# EAGLE board LipSync_Interface_Board (EAGLE 7.6.0)
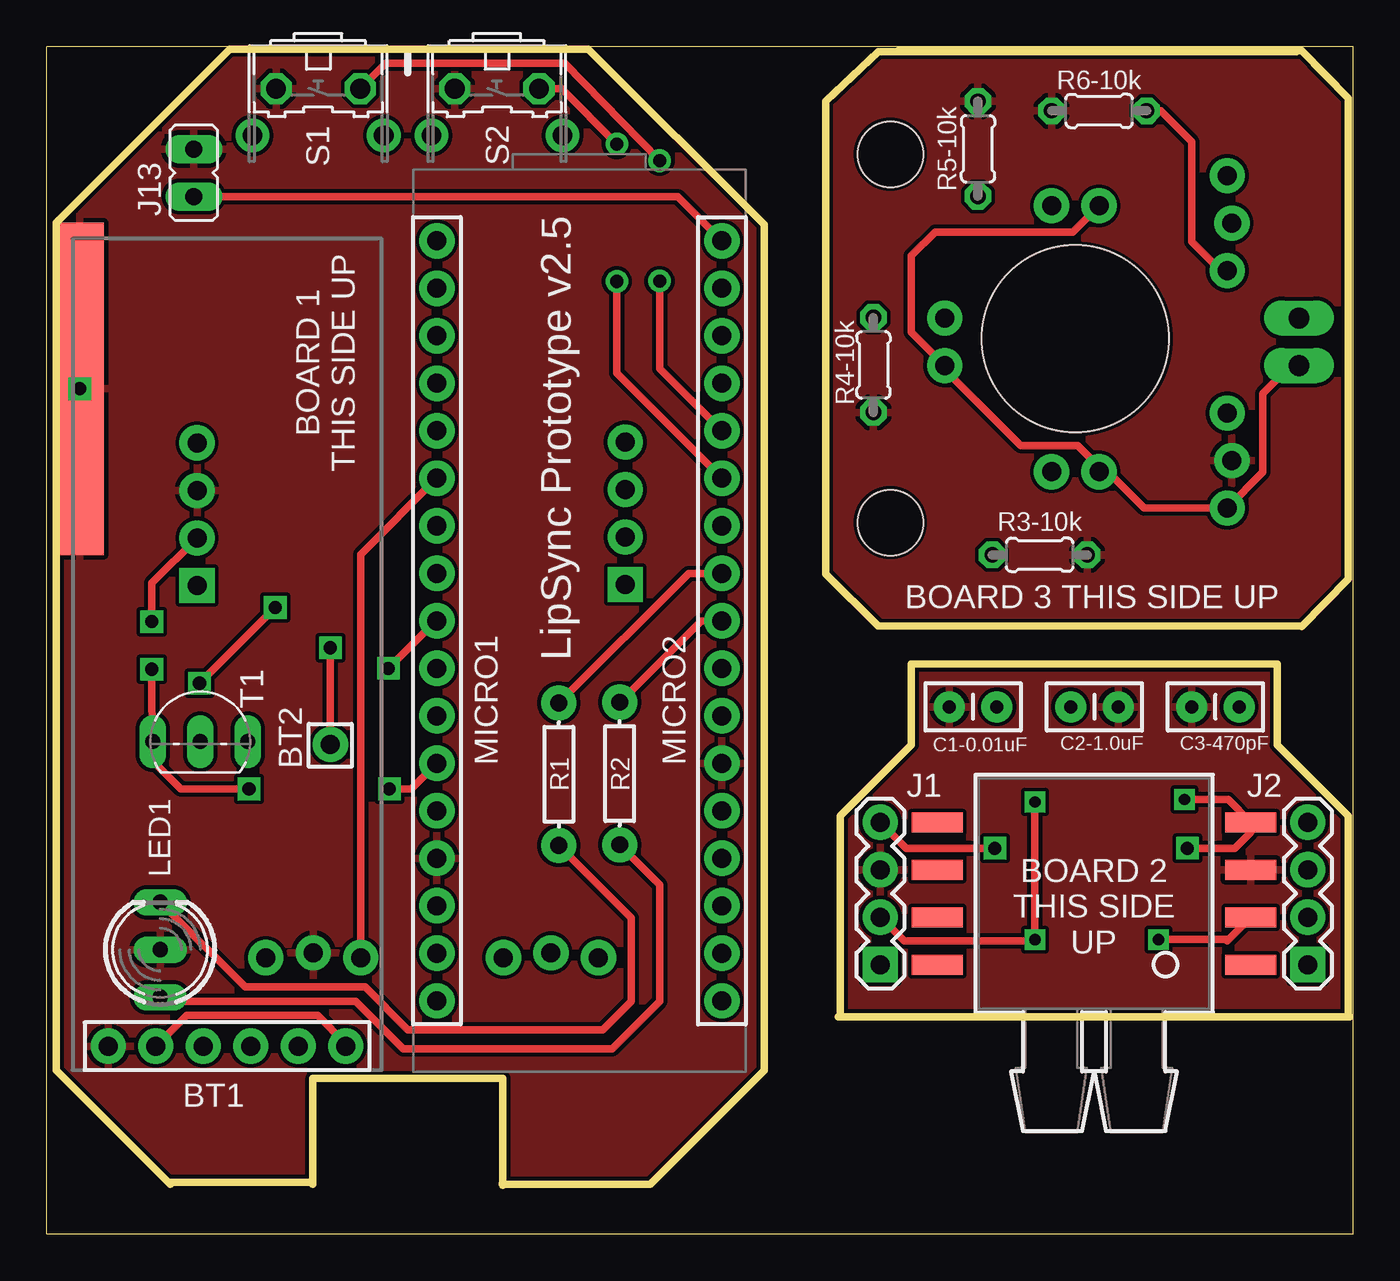
[diagram p0: board, top side]
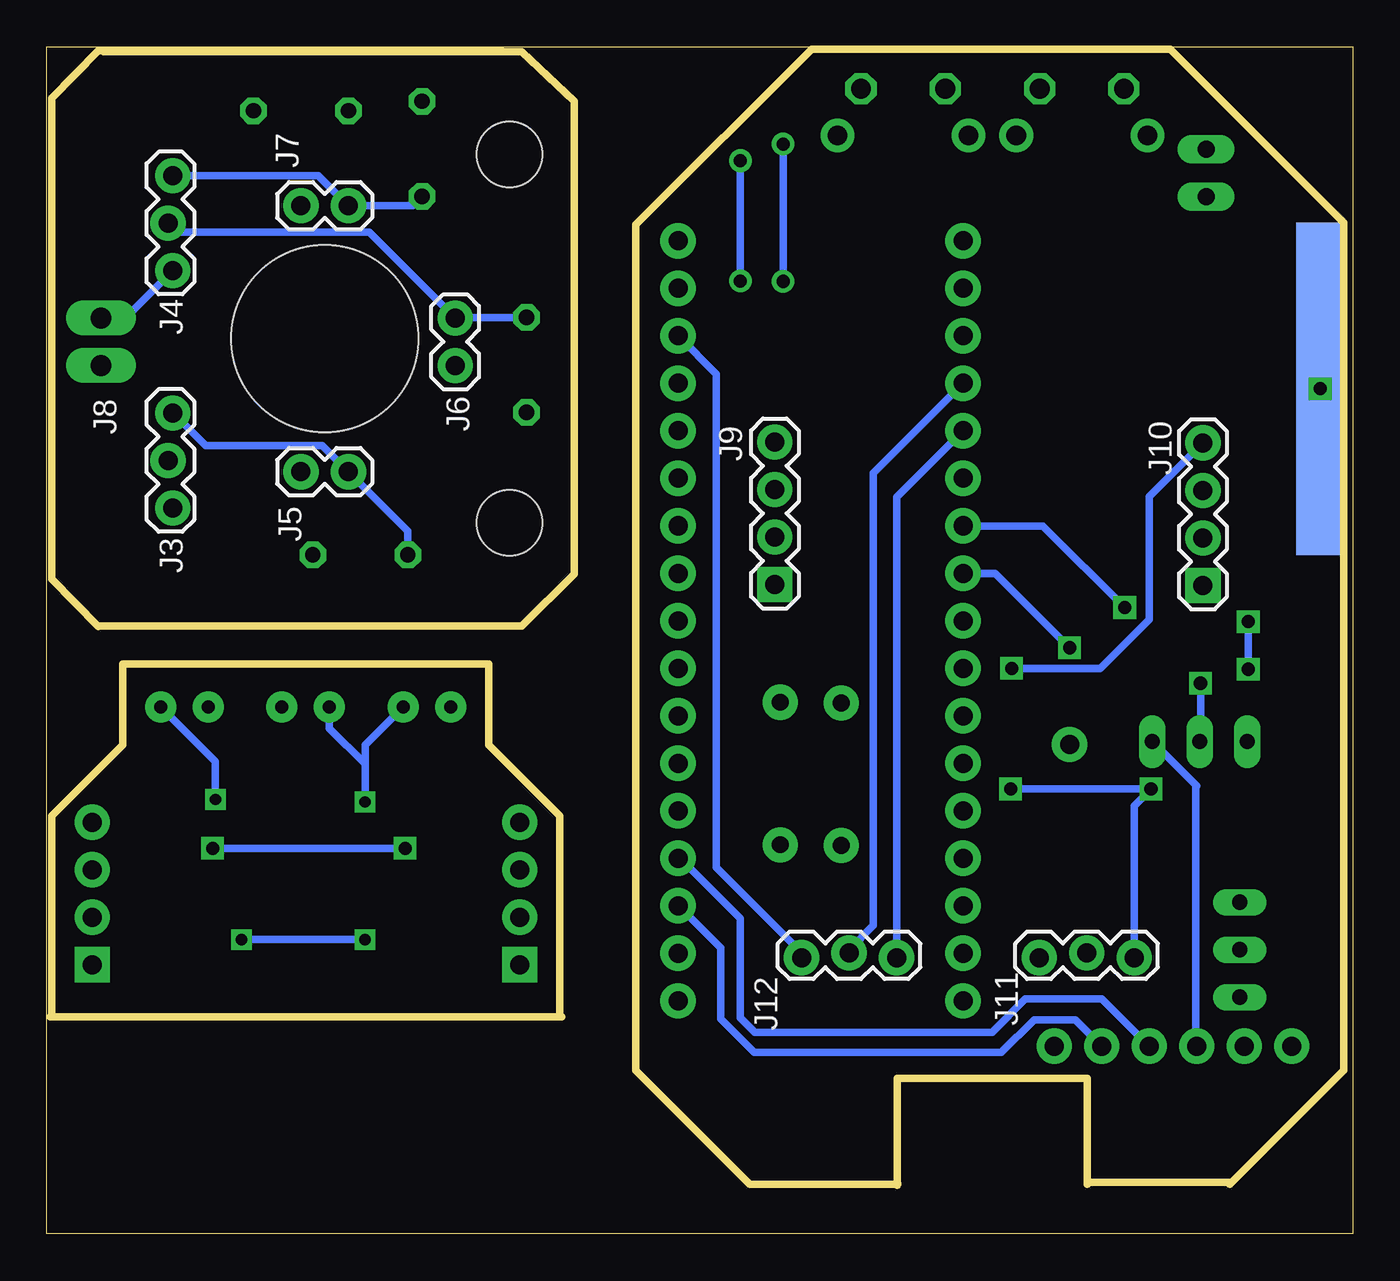
[diagram p1: board, bottom side, seen from below]

Size 69.85 x 63.5 mm. Coordinates in mm from the lower left corner, seen from the top.
Outline: 6.6,2.67 0.51,8.76 0.51,54.1 9.78,63.37 28.96,63.37 38.35,53.98 38.35,8.76 32.26,2.67
Outline: 69.67,11.61 42.32,11.61
Outline: 45.54,63.28 67.09,63.28 69.59,60.74 69.59,35.02 67.09,32.48
Outline: 14.22,2.65 14.22,8.33 24.38,8.33 24.38,2.6
Outline: 14.21,2.75 6.62,2.75 6.62,2.65
Outline: 32.27,2.65 24.36,2.65 24.36,2.71
Outline: 46.3,30.48 65.79,30.48 65.79,26.16 69.6,22.35 69.6,11.68
Outline: 66.8,63.25 44.45,63.25 41.66,60.58 41.66,35.31 44.45,32.51 67.09,32.51
Outline: 46.23,30.48 46.23,26.16 42.42,22.35 42.42,11.68
Outline: 0,0 69.85,0 69.85,63.5 0,63.5 0,0
Copper layers (1*16): Top 0.035mm / dielectric 1.5mm / Bottom 0.035mm
Design rules "SparkFun": minimum track width 8mil, minimum drill 20mil, track to track 8mil, track to pad 8mil, pad to pad 8mil, via to via 8mil, smd to smd 8mil, copper to edge 8mil, drill to drill 8mil, minimum pad ring 12mil, minimum via ring 10mil, stop-mask expansion 4mil, vias tented up to drill 20mil, thermal gap 10mil
Net classes: 0 GND: clearance 0.205 mm; 2 GND2: clearance 0.205 mm to class 0, clearance 0.205 mm to class 1, clearance 0.205 mm; 3 GND3: clearance 0.205 mm to class 0, clearance 0.205 mm to class 1, clearance 0.205 mm to class 2, clearance 0.205 mm
Holes 10 mm at 54.99,47.88
Holes 3.5 mm at 45.11,38.04 45.11,57.74

## Footprints (pad centres in the part's own frame; a part is rotated, then mirrored left to right if it is on the bottom)
CAP-PTH-SMALLEZ = drill 0.7 pad 1.651: 1 0,0; 2 2.54,0
1X02 = drill 1.016 pad 1.88: 1 0,0; 2 2.54,0
1X04 = drill 1.016 pad 1.88 square: 1 0,0 | drill 1.016 pad 1.88: 2 2.54,0; 3 5.08,0; 4 7.62,0
1X03_LOCK = drill 1.016 pad 1.88: 1 0,0.127; 2 2.54,-0.127; 3 5.08,0.127
1X02_LONGPADS = drill 1.118 pad 1.88 long: 1 0,0; 2 2.54,0
JP1 = drill 0.914 long: 1 0,-1.27; 2 0,1.27
DUOLED-C-5MM = drill 0.813 long: AR 2.54,0; AX -2.54,0; C 0,0
AXIAL-0.3 = drill 0.9 pad 1.88: P$1 -3.81,0; P$2 3.81,0
0204/5 = drill 0.813 octagon: 1 -2.54,0; 2 2.54,0
B3F-31XX-CUSTOM = drill 1.05 pad 1.6 octagon: 1 -2.25,-1.245; 2 2.25,-1.245 | drill 1.05 pad 1.8: 3 -3.505,1.245; 4 3.505,1.245
TO92-EBC = drill 0.813 long: B 0,-1.27; C 2.54,-1.27; E -2.54,-1.27
BLUE_MATE_RN42_HEADER_FOOTPRINT = drill 1.016 pad 1.88: CTS-I 1.27,12.065; GND 1.27,14.605; PIO4 17.399,2.731; RTS-O 1.27,1.905; RX-I 1.27,4.445; TX-O 1.27,6.985; VCC 1.27,9.525
SOP8 = smd 2.731 x 1.067: 1 8.382,-3.81; 2 8.382,-1.27; 3 8.382,1.27; 4 8.382,3.81; 5 -8.382,3.81; 6 -8.382,1.27; 7 -8.382,-1.27; 8 -8.382,-3.81
ARDUINO_MICRO_HEADER_FOOTPRINT = drill 1.016 pad 1.88: 3V3 16.51,6.35; 5V 16.51,31.75; A0 16.51,11.43; A1 16.51,13.97; A2 16.51,16.51; A3 16.51,19.05; A4 16.51,21.59; A5 16.51,24.13; D2 1.27,29.21; D3 1.27,26.67; D4 1.27,24.13; D5 1.27,21.59; D6 1.27,19.05; D7 1.27,16.51; D8 1.27,13.97; D9 1.27,11.43; D10 1.27,8.89; D11 1.27,6.35; D12 1.27,3.81; D13 16.51,3.81; GND 1.27,31.75; GND@1 16.51,36.83; MISO 16.51,41.91; MOSI 1.27,44.45; NC 16.51,26.67; NC@1 16.51,29.21; REF 16.51,8.89; RST 1.27,34.29; RST@1 16.51,34.29; RX1 1.27,36.83; SCK 16.51,44.45; SS 1.27,41.91; TX1 1.27,39.37; VIN 16.51,39.37
EXPOSED_GND = smd 2.54 x 17.78: GND1 0,0

## Placement (x,y rotation side)
C1  470pF  [CAP-PTH-SMALLEZ]  63.75,28.19 180 top
C2  0.01uF  [CAP-PTH-SMALLEZ]  54.74,28.19 0 top
C3  1.0uF  [CAP-PTH-SMALLEZ]  50.8,28.19 180 top
J1  [1X02]  56.26,40.77 0 bottom
J2  [1X02]  56.26,54.99 0 bottom
J3  [1X04]  8.03,34.69 90 bottom
J4  [1X04]  67.43,14.4 90 top
J5  [1X04]  44.57,14.4 90 top
J6  [1X04]  30.92,34.73 90 bottom
J7  [1X03_LOCK]  24.42,14.9 180 bottom
J8  [1X03_LOCK]  11.72,14.9 180 bottom
J9  [1X03_LOCK]  63.24,43.91 270 bottom
J10  [1X02_LONGPADS]  66.95,46.45 90 bottom
J11  [1X03_LOCK]  63.24,56.61 270 bottom
J12  [1X02]  48.02,46.45 90 bottom
JP1  [JP1]  7.87,56.76 180 top
LED1  [DUOLED-C-5MM]  6.07,15.21 90 top
R1  300  [AXIAL-0.3]  30.63,24.63 270 top
R2  300  [AXIAL-0.3]  27.38,24.59 270 top
R3  [0204/5]  53.09,36.32 180 top
R4  [0204/5]  49.78,58.04 270 top
R5  [0204/5]  56.26,60.07 0 top
R6  [0204/5]  44.2,46.48 90 top
S1  [B3F-31XX-CUSTOM]  14.51,60.01 180 top
S2  [B3F-31XX-CUSTOM]  24.07,60.01 180 top
T1  2N3906  [TO92-EBC]  8.21,27.61 0 top
U2  SF_MATE_RN42  [BLUE_MATE_RN42_HEADER_FOOTPRINT]  17.9,8.78 90 top
U3  MPXV7002  [SOP8]  56,18.21 0 top
U$1  ARDUINO_MICRO  [ARDUINO_MICRO_HEADER_FOOTPRINT]  37.37,56.93 180 top
U$2  EXPOSED_GND  [EXPOSED_GND]  1.76,45.2 0 top
U$3  EXPOSED_GND  [EXPOSED_GND]  1.76,45.2 0 bottom

## Library data of the parts
C1-C3 = SparkFun-Capacitors
J1 J2 J7-J12 = SparkFun-Connectors
J3-J6 = SparkFun-Connectors; PROD_ID: CONN-09696
JP1 = jumper
LED1 = led
R1 R2 = SparkFun-Passives
R3-R6 = resistor
S1 S2 = switch-omron
T1 = transistor-neu-to92
U2 U3 U$1-U$3 = IVAN_custom

## Nets
3V3: U$1.3V3
GND: J3.3 J8.2 JP1.1 LED1.C S1.2 S2.2 U2.GND U$1.GND U$1.GND@1 U$2.GND1 U$3.GND1
GND2 [GND2]: C1.2 C2.2 C3.2 J5.3 U3.3
GND3: J9.2 R3.1 R4.1 R5.1 R6.1
N$1: U2.PIO4 U$1.A4
N$2: T1.C U2.VCC
N$3: U2.TX-O U$1.RX1
N$4: U2.RX-I U$1.TX1
N$5: J7.2 U$1.A0
N$6: J7.1 U$1.A1
N$7: C1.1 J5.4 U3.4
N$8: C2.1 C3.1 J5.2 U3.2
N$9: U2.CTS-I U2.RTS-O
N$10: J7.3 U$1.D10
N$11: J3.4 U$1.A5
N$12: LED1.AX R1.P$2
N$13: LED1.AR R2.P$2
N$14: S1.1 U$1.D8
N$15: S2.1 U$1.D7
N$16: J1.1 J2.1 J9.3 J10.1 J12.1
N$18: R1.P$1 U$1.D4
N$19: R2.P$1 U$1.D5
N$20: T1.B U$1.A3
N$21: J8.3 U$1.A2
N$22: J1.2 J9.1 R3.2
N$23: JP1.2 U$1.D12
N$24: J2.2 J11.1 R4.2
N$27: J10.2 J11.3 R5.2
N$28 [GND3]: J11.2 J12.2 R6.2
VCC: J3.2 J8.1 T1.E U$1.5V

## Tracks (layer width: path | path; a pad name or v marks a point on that pad's centre or on a via)
GND  (via drill 0.7)
  other vias: 1.76,45.2
  pour Top: 0.51,54.1 9.78,63.37 28.96,63.37 38.35,53.98 38.35,8.76 32.26,2.67 6.6,2.67 0.51,8.76
GND2
  pour Top: 42.42,11.56 42.42,22.48 46.23,26.29 46.23,30.48 65.79,30.48 65.79,26.29 69.6,22.48 69.6,11.68 69.47,11.56
GND3
  pour Top: 67.04,32.54 44.34,32.54 41.64,35.37 41.64,60.59 44.34,63.29 66.99,63.29 69.59,60.69 69.59,34.99 67.09,32.49
N$1  (via drill 0.7)
  Top 0.406: v15.16,31.36 15.16,26.33 U2.PIO4
  Bottom 0.406: U$1.A4 19.15,35.34 v15.16,31.36
N$2
  Bottom 0.406: T1.C 8.41,24.01 | 8.41,24.01 8.37,23.96 | U2.VCC 8.41,10.05 8.41,24.01
N$3
  Bottom 0.406: U$1.RX1 35.97,20.1 32.77,16.89 32.77,11.56 32,10.79 19.3,10.79 17.53,12.57 13.44,12.57 U2.TX-O
N$4
  Bottom 0.406: U2.RX-I 14.86,11.46 17.07,11.46 18.82,9.71 32.02,9.71 33.81,11.51 33.81,15.3 36.07,17.56 U$1.TX1
N$5
  Bottom 0.406: U$1.A0 25.65,40.7 25.65,16.51 26.96,15.21 J7.2
N$6
  Bottom 0.406: U$1.A1 24.42,39.4 J7.1
N$7  (via drill 0.6, 0.7 pad 1.02)
  Top 0.406: v60.98,20.63 63.52,20.63 64.38,21.48 U3.4 63.16,23.24 v60.83,23.24 | v50.69,20.63 45.96,20.63 J5.4
  Bottom 0.406: v60.98,20.63 v50.69,20.63 | v60.83,23.24 60.83,25.27 C1.1
N$8  (via drill 0.6)
  Top 0.406: J5.2 45.84,15.67 52.76,15.67 v52.83,15.75 v52.83,23.11 | U3.2 63.11,15.67 63.03,15.75 v59.44,15.75
  Bottom 0.406: v52.83,15.75 v59.44,15.75 | C3.1 52.83,26.16 52.83,25.15 | 52.83,25.15 v52.83,23.11 | C2.1 54.74,27.05 52.83,25.15
N$9
  Top 0.406: U2.CTS-I 7.47,11.68 14.48,11.68 15.99,10.17 U2.RTS-O
N$10
  Bottom 0.406: U$1.D10 34.06,46 34.06,19.61 29.5,15.04 J7.3
N$11  (via drill 0.7)
  Top 0.406: U$1.A5 20.81,32.8 v18.27,30.25
  Bottom 0.406: v18.27,30.25 13.52,30.25 10.91,32.85 10.91,39.43 J3.4
N$12
  Top 0.406: R1.P$2 32.77,18.68 32.77,12.45 30.23,9.91 19.05,9.91 16.51,12.45 6.29,12.45 LED1.AX
N$13
  Top 0.406: R2.P$2 31.24,16.91 31.24,12.45 29.72,10.92 19.3,10.92 17.02,13.21 10.61,13.21 LED1.AR
N$14  (via drill 0.7 pad 1.02)
  Top 0.406: S1.1 18.13,62.61 27.69,62.61 v32.77,57.4 | 36.04,42.96 U$1.D8 32.77,46.29 v32.77,50.97
  Bottom 0.406: v32.77,57.4 v32.77,50.97
N$15  (via drill 0.7 pad 1.02)
  Top 0.406: S2.1 27.52,61.25 v30.48,58.29 | v30.48,50.95 30.48,46.04 U$1.D7
  Bottom 0.406: v30.48,58.29 v30.48,50.95
N$16
  Top 0.406: J10.1 66.52,46.45 65.02,44.96 65.02,40.75 J9.3 58.67,38.83 56.84,40.67 J1.1 56.33,40.95 55.12,42.16 52.07,42.16 48.02,46.22 J12.1 46.23,48.24 46.23,52.32 47.5,53.59 54.86,53.59 J2.1
N$18
  Top 0.406: R1.P$1 34.99,32.8 U$1.D4
N$19
  Top 0.406: R2.P$1 34.31,35.34 U$1.D5
N$20  (via drill 0.7)
  Top 0.406: v12.21,33.51 v8.16,29.45
  Bottom 0.406: U$1.A3 16.59,37.88 v12.21,33.51 | v8.16,29.45 8.16,26.38 T1.B
N$21
  Top 0.406: J8.3 16.8,36.35 U$1.A2
N$22
  Bottom 0.406: J9.1 63.09,43.91 61.34,42.16 55.12,42.16 J1.2 50.55,37.59 R3.2
N$23
  Top 0.406: JP1.2 33.73,55.48 U$1.D12
N$24
  Bottom 0.406: J11.1 55.34,56.61 J2.2 50.29,54.99 R4.2
N$27
  Top 0.406: J11.3 62.77,51.53 61.21,53.09 61.21,58.42 59.56,60.07 R5.2
  Bottom 0.406: J10.2 65.65,48.99 J11.3
N$28
  Bottom 0.406: J11.2 63.22,54.07 62.74,53.59 52.62,53.59 J12.2 47.98,49.02 R6.2
VCC  (via drill 0.7)
  Top 0.406: v10.81,23.8 7.17,23.8 5.67,25.3 T1.E 5.62,28.39 v5.62,30.2 | v5.62,32.76 5.62,34.81 J3.2 | v18.32,23.8 19.49,23.8 U$1.5V
  Bottom 0.406: v18.32,23.8 v10.81,23.8 11.72,22.9 J8.1 | v5.62,30.2 v5.62,32.76

## Text on the board
tNames: R6-10k | R5-10k | S1 | S2 | J13 | BOARD 1 / THIS SIDE UP | R4-10k | R3-10k | BOARD 3 THIS SIDE UP | LipSync Prototype v2.5 | T1 | C1-0.01uF | C2-1.0uF | C3-470pF | BT2 | MICRO1 | MICRO2 | R1 | R2 | J1 | J2 | LED1 | BOARD 2 / THIS SIDE / UP | BT1
bNames: J7 | J4 | J6 | J8 | J10 | J9 | J5 | J3 | J11 | J12